# Altium PCB mppt.PcbDoc (part 2 of 6)
Units mm, origin at the board's own origin, x right, y up, seen from the top; angles counter-clockwise.
Board outline 161 x 166 mm, 6 copper layers (Top Layer, Layer 1, Layer 2, Layer 3, Layer 4, Bottom Layer), stack 0.815 mm thick; 460 components, 230 nets, 1421 pads, 2551 vias.
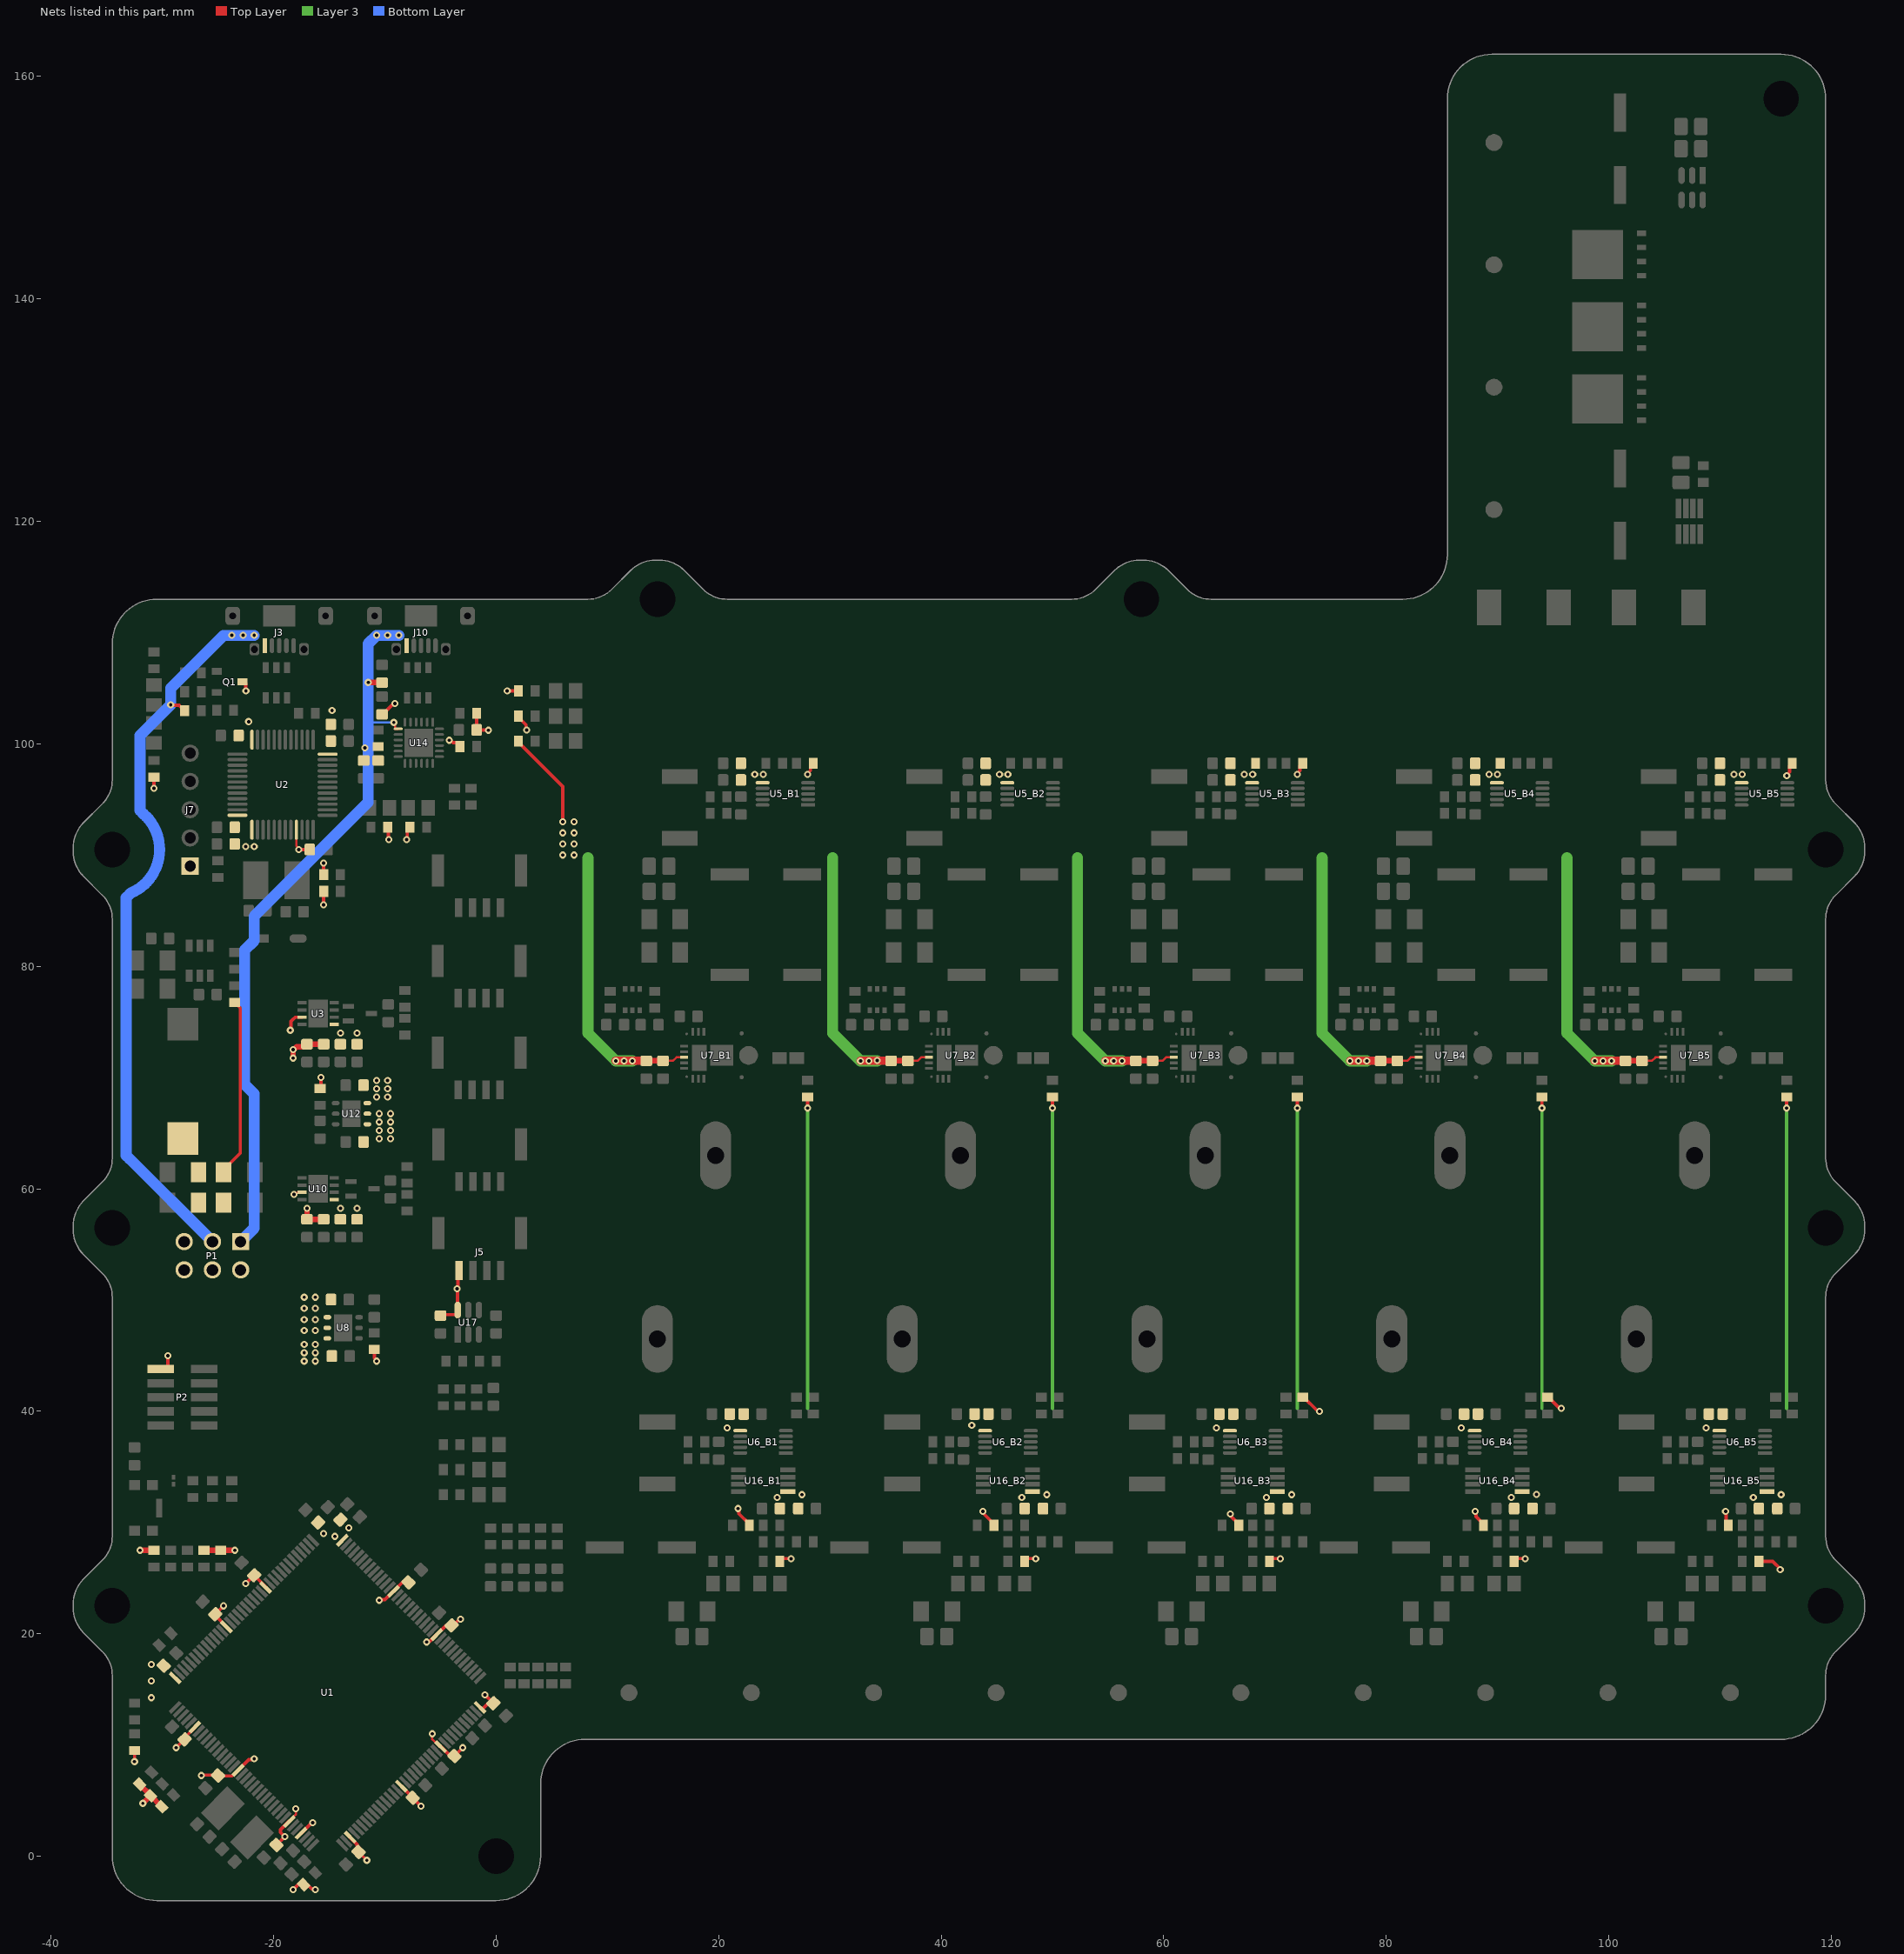
[diagram p6: the nets of this part, all layers, seen from the top]

## Footprints (in the part's own frame and the unit in brackets; to place one, negate y for a bottom-side part, rotate by r counter-clockwise, add the part's x,y. Pads: shape width x height; smd on the part's side, far side on the other; paste and mask are expansions set on the pad) (continued)
DFN6D_L [mm] "SON, 6-Leads, Body 3x3mm, Pitch 0.95mm, Thermal Pad 2.4x1.65mm, IPC High Density"
  oval 0.7x0.4 smd: 1(-1.425,0.95) 2(-1.425,0) 3(-1.425,-0.95) 4(1.425,-0.95) 5(1.425,0) 6(1.425,0.95)
  rect 1.65x2.4 smd: 7(0,0)
  silkscreen extent -1.7,-1.7 1.7,1.7, body extent -1.55,-1.55 1.55,1.55, height 0.95
FP-90120-0125-MFG [mm]
  rect 1.55x1.55 hole 1 paste-2539.97 mask+0: 1(-5.08,0)
  round 1.55 hole 1 paste-2539.97 mask+0: 2(-2.54,0) 3(0,0) 4(2.54,0) 5(5.08,0)
  silkscreen extent -7.07,-1.27 6.35,1.27, body extent -6.45,-1.37 6.45,1.37, height 0.25
FP-CC1206-1_25-IPC_B [mm]
  rect 1.403x1.806 smd paste+0 mask+0: 1(-1.4,0) 2(1.4,0)
  silkscreen extent -0.32,-0.8 0.32,0.8, body extent -2.35,-1.15 2.35,1.15, height 0.25
FP-CP2102N-A02-GQFN24R-IPC_C [mm]
  rect 0.81x0.239 smd paste+0 mask+0: 1(-1.851,1.25)
  rrect100% 0.81x0.239 smd paste+0 mask+0: 2(-1.851,0.75) 3(-1.851,0.25) 4(-1.851,-0.25) 5(-1.851,-0.75) 6(-1.851,-1.25) 13(1.851,-1.25) 14(1.851,-0.75) 15(1.851,-0.25) 16(1.851,0.25) 17(1.851,0.75) 18(1.851,1.25)
  rrect100% 0.239x0.81 smd paste+0 mask+0: 7(-1.25,-1.851) 8(-0.75,-1.851) 9(-0.25,-1.851) 10(0.25,-1.851) 11(0.75,-1.851) 12(1.25,-1.851) 19(1.25,1.851) 20(0.75,1.851) 21(0.25,1.851) 22(-0.25,1.851) 23(-0.75,1.851) 24(-1.25,1.851)
  rect 2.55x2.55 smd paste-1000 mask+0: 25(0,0)
  silkscreen extent -2.78,-2 2,2, body extent -2.36,-2.36 2.36,2.36, height 0.25
FP-DBV0006A-IPC_B [mm]
  rect 1.505x0.57 smd paste+0 mask+0: 1(-1.1,0.95)
  rrect100% 1.505x0.57 smd paste+0 mask+0: 2(-1.1,0) 3(-1.1,-0.95) 4(1.1,-0.95) 5(1.1,0) 6(1.1,0.95)
  silkscreen extent -2.4,-1.7 1.4,1.7, body extent -2.1,-1.7 2.1,1.7, height 0.25
FP-DGS0010A-IPC_C [mm]
  rect 1.257x0.312 smd paste+0 mask+0: 1(-2.051,1)
  rrect100% 1.257x0.312 smd paste+0 mask+0: 2(-2.051,0.5) 3(-2.051,0) 4(-2.051,-0.5) 5(-2.051,-1) 6(2.051,-1) 7(2.051,-0.5) 8(2.051,0) 9(2.051,0.5) 10(2.051,1)
  silkscreen extent -3.38,-1.5 0.92,1.5, body extent -2.78,-1.6 2.78,1.6, height 0.25
FP-NCU18-0_15-IPC_A [mm]
  rect 1.306x1.058 smd paste+0 mask+0: 1(-0.776,0) 2(0.776,0)
  silkscreen extent -1.43,-0.93 1.43,0.93, body extent -1.93,-1.03 1.93,1.03, height 0.25
FP-PG-TDSON-8-MFG [mm]
  rect 0.5x0.85 smd paste-1000 mask+0: 1(-1.905,-2.9) 2(-0.635,-2.9) 3(0.635,-2.9) 4(1.905,-2.9)
  rect 4.41x4.55 smd paste-1000 mask-1000: 5-6-7-8(0,1.05)
  silkscreen extent -2.67,-4.05 2.68,3.05, body extent -2.99,-3.43 3,3.42, height 0.25
FP-SOD123-IPC_A [mm]
  rect 1.557x0.742 smd paste+0 mask+0: 1(-1.7,0)
  rrect100% 1.557x0.742 smd paste+0 mask+0: 2(1.7,0)
  silkscreen extent -3.39,-0.77 1.33,0.78, body extent -2.98,-1.28 2.98,1.28, height 0.25
FP-ST0201-MFG [mm]
  rect 0.425x0.3 smd paste-1000 mask+0: 1(-0.312,0) 2(0.313,0)
  silkscreen extent -1.2,-0.52 0.33,0.52, body extent -0.63,-0.28 0.63,0.28, height 0.25
IEC_HotSurface_Small [mm]
  silkscreen extent -2.72,-2.36 2.72,2.35
IND_VER2923_COC [mil]
  oval 240x110 hole 60 slot 190 at 0 deg paste-99999 mask+0: 1(0,0) 2(650,-205.91)
  silkscreen extent -220,-442 870,236, body extent -215,-436 865,232, height 896
LQFP144-20x20mm [mil]
  rect 53x14 smd paste+0 mask+0: 1(-418.31,344.49) 2(-418.31,324.8) 3(-418.31,305.12) 4(-418.31,285.43) 5(-418.31,265.75) 6(-418.31,246.06) 7(-418.31,226.38) 8(-418.31,206.69) 9(-418.31,187.01) 10(-418.31,167.32) 11(-418.31,147.64) 12(-418.31,127.95) 13(-418.31,108.27) 14(-418.31,88.58) 15(-418.31,68.9) 16(-418.31,49.21) 17(-418.31,29.53) 18(-418.31,9.84) 19(-418.31,-9.84) 20(-418.31,-29.53) 21(-418.31,-49.21) 22(-418.31,-68.9) 23(-418.31,-88.58) 24(-418.31,-108.27) 25(-418.31,-127.95) 26(-418.31,-147.64) 27(-418.31,-167.32) 28(-418.31,-187.01) 29(-418.31,-206.69) 30(-418.31,-226.38) 31(-418.31,-246.06) 32(-418.31,-265.75) 33(-418.31,-285.43) 34(-418.31,-305.12) 35(-418.31,-324.8) 36(-418.31,-344.49) 73(418.31,-344.49) 74(418.31,-324.8) 75(418.31,-305.12) 76(418.31,-285.43) 77(418.31,-265.75) 78(418.31,-246.06) 79(418.31,-226.38) 80(418.31,-206.69) 81(418.31,-187.01) 82(418.31,-167.32) 83(418.31,-147.64) 84(418.31,-127.95) 85(418.31,-108.27) 86(418.31,-88.58) 87(418.31,-68.9) 88(418.31,-49.21) 89(418.31,-29.53) 90(418.31,-9.84) 91(418.31,9.84) 92(418.31,29.53) 93(418.31,49.21) 94(418.31,68.9) 95(418.31,88.58) 96(418.31,108.27) 97(418.31,127.95) 98(418.31,147.64) 99(418.31,167.32) 100(418.31,187.01) 101(418.31,206.69) 102(418.31,226.38) 103(418.31,246.06) 104(418.31,265.75) 105(418.31,285.43) 106(418.31,305.12) 107(418.31,324.8) 108(418.31,344.49)
  rect 14x53 smd paste+0 mask+0: 37(-344.49,-418.31) 38(-324.8,-418.31) 39(-305.12,-418.31) 40(-285.43,-418.31) 41(-265.75,-418.31) 42(-246.06,-418.31) 43(-226.38,-418.31) 44(-206.69,-418.31) 45(-187.01,-418.31) 46(-167.32,-418.31) 47(-147.64,-418.31) 48(-127.95,-418.31) 49(-108.27,-418.31) 50(-88.58,-418.31) 51(-68.9,-418.31) 52(-49.21,-418.31) 53(-29.53,-418.31) 54(-9.84,-418.31) 55(9.84,-418.31) 56(29.53,-418.31) 57(49.21,-418.31) 58(68.9,-418.31) 59(88.58,-418.31) 60(108.27,-418.31) 61(127.95,-418.31) 62(147.64,-418.31) 63(167.32,-418.31) 64(187.01,-418.31) 65(206.69,-418.31) 66(226.38,-418.31) 67(246.06,-418.31) 68(265.75,-418.31) 69(285.43,-418.31) 70(305.12,-418.31) 71(324.8,-418.31) 72(344.49,-418.31) 109(344.49,418.31) 110(324.8,418.31) 111(305.12,418.31) 112(285.43,418.31) 113(265.75,418.31) 114(246.06,418.31) 115(226.38,418.31) 116(206.69,418.31) 117(187.01,418.31) 118(167.32,418.31) 119(147.64,418.31) 120(127.95,418.31) 121(108.27,418.31) 122(88.58,418.31) 123(68.9,418.31) 124(49.21,418.31) 125(29.53,418.31) 126(9.84,418.31) 127(-9.84,418.31) 128(-29.53,418.31) 129(-49.21,418.31) 130(-68.9,418.31) 131(-88.58,418.31) 132(-108.27,418.31) 133(-127.95,418.31) 134(-147.64,418.31) 135(-167.32,418.31) 136(-187.01,418.31) 137(-206.69,418.31) 138(-226.38,418.31) 139(-246.06,418.31) 140(-265.75,418.31) 141(-285.43,418.31) 142(-305.12,418.31) 143(-324.8,418.31) 144(-344.49,418.31)
  silkscreen extent -468,-465 465,465, body extent -431,-431 431,431, height 63
MH_M3-Footprint-1 [mil]
  round 60 hole 125.98 unplated: 6(0,0)
ONSC-SOT-363-6-419B-02_W_V [mm] "SOT23, 6-Leads, Body 2x1.25mm, Pitch 0.65mm"
  rect 0.5x0.4 smd: 1(-0.95,0.65) 2(-0.95,0) 3(-0.95,-0.65) 4(0.95,-0.65) 5(0.95,0) 6(0.95,0.65)
  silkscreen extent -1.87,-1.1 0.3,1.1, body extent -1.05,-1 1.05,1, height 1.1
RES_3L000FEB_VIS [mil]
  rect 53x127 smd paste+0 mask+0: 1(-109.5,0) 2(109.5,0)
  silkscreen extent -71,-68 71,68, body extent -128,-64 128,64, height 15
RESC1608X55X25ML10T15 [mm] "Chip Resistor, 2-Leads, Body 1.60x0.80mm, IPC Low Density"
  rect 0.8x1 smd: 1(-0.75,0) 2(0.75,0)
  body extent -0.85,-0.45 0.85,0.45, height 0.55
RESC5032X135N [mm]
  rect 2.25x3.4 smd: 1(-1.85,0) 2(1.85,0)
  silkscreen extent 0,-1.5 0,1.5, body extent -2.59,-1.68 2.56,1.67, height 1.4
"SMD Push Button-Footprint-1" [mm]
  rect 0.9x1 smd: 1(-0.018,0.038) 2(-0.018,-1.562) 3(4.082,-1.562) 4(4.082,0.038)
  rect 1.7x0.55 smd: 5(2.032,0.663)
  silkscreen extent 0.83,-2.16 3.23,-2.16, body extent -0.27,-2.16 4.33,0.64, height 1.91
"SMD, P=1.27mm" [mm]
  rect 0.76x2.4 smd: 1(-0.127,0.076) 2(-0.127,3.976) 3(1.143,0.076) 4(1.143,3.976) 5(2.413,0.076) 6(2.413,3.976) 7(3.683,0.076) 8(3.683,3.976) 9(4.953,0.076) 10(4.953,3.976)
  silkscreen extent -3.81,-1.78 8.67,4.9, body extent -0.76,-2.41 5.59,4.95, height 6.99
SMTC-TSW-103-07-G-D_V [mm] "THD, 6-Leads, Body 7.62x5.08mm, Pitch 2.54mm"
  rect 1.55x1.55 hole 1.02: 1(-2.54,-1.27)
  round 1.55 hole 1.02: 2(-2.54,1.27) 3(0,-1.27) 4(0,1.27) 5(2.54,-1.27) 6(2.54,1.27)
  silkscreen extent -4.59,-2.54 3.81,2.54, body extent -3.81,-2.54 3.81,2.54, height 8.38
"Solder Pad-Footprint-1" [mil]
  round 60 smd paste-99999 mask+4: SP(155,165)
  Top Layer region: 0,0 315,0 315,315 0,315
  Bottom Layer region: 0,0 315,0 315,315 0,315
SON_4DRBRQ1_TEX [mil]
  rect 32x12 smd paste+0 mask+0: 1(-57,38.39) 2(-57,12.8) 3(-57,-12.79) 4(-57,-38.38) 5(57,-38.38) 6(57,-12.79) 7(57,12.8) 8(57,38.39)
  rect 69x98 smd paste+0 mask+0: 9(0,0)
  silkscreen extent -105,-66 66,66, body extent -61,-61 61,61, height 39
SOT23-6L_STM [mil]
  rect 38.5x22 smd paste+0 mask+0: 1(-53.75,37.4) 2(-53.75,0) 3(-53.75,-37.4) 4(53.75,-37.4) 5(53.75,0) 6(53.75,37.4)
  silkscreen extent -40,-65 39,65, body extent -59,-60 59,60, height 57
SOT323-3L_STM [mil]
  rect 18x40 smd paste+0 mask+0: 1(-25.59,-41) 2(25.59,-41) 3(0,41)
  silkscreen extent -98,-52 49,31, body extent -44,-47 44,47, height 43
STM-LQFP48_N [mm] "QFP, 48-Leads, Body 7x7mm, Pitch 0.5mm, IPC Medium Density"
  oval 1.8x0.3 smd: 1(-4.05,2.75) 2(-4.05,2.25) 3(-4.05,1.75) 4(-4.05,1.25) 5(-4.05,0.75) 6(-4.05,0.25) 7(-4.05,-0.25) 8(-4.05,-0.75) 9(-4.05,-1.25) 10(-4.05,-1.75) 11(-4.05,-2.25) 12(-4.05,-2.75) 25(4.05,-2.75) 26(4.05,-2.25) 27(4.05,-1.75) 28(4.05,-1.25) 29(4.05,-0.75) 30(4.05,-0.25) 31(4.05,0.25) 32(4.05,0.75) 33(4.05,1.25) 34(4.05,1.75) 35(4.05,2.25) 36(4.05,2.75)
  oval 0.3x1.8 smd: 13(-2.75,-4.05) 14(-2.25,-4.05) 15(-1.75,-4.05) 16(-1.25,-4.05) 17(-0.75,-4.05) 18(-0.25,-4.05) 19(0.25,-4.05) 20(0.75,-4.05) 21(1.25,-4.05) 22(1.75,-4.05) 23(2.25,-4.05) 24(2.75,-4.05) 37(2.75,4.05) 38(2.25,4.05) 39(1.75,4.05) 40(1.25,4.05) 41(0.75,4.05) 42(0.25,4.05) 43(-0.25,4.05) 44(-0.75,4.05) 45(-1.25,4.05) 46(-1.75,4.05) 47(-2.25,4.05) 48(-2.75,4.05)
  silkscreen extent -4.17,-2.75 2.75,3.5, body extent -4.5,-4.5 4.5,4.5, height 1.6
TO-236AB-3 [mm] "SOT23, 3-Leads, Body 2.90x2.30mm, Pitch 0.95mm, IPC Medium Density"
  rect 0.9x0.6 smd: 1(-1.15,0.95) 2(-1.15,-0.95) 3(1.15,0)
  silkscreen extent -1.27,-1.5 0.7,1.92, body extent -1.3,-1.5 1.3,1.5, height 1.1
USB [mm] "Micro USB port, Molex 47590-0001"
  rect 0.4x1.35 smd: 1(0,0)
  oval 0.4x1.35 smd: 2(-0.65,0) 3(-1.3,0) 4(-1.95,0) 5(-2.6,0)
  rrect50% 0.85x1.1 hole 0.65 slot 0.85 at 90 deg: 6(-3.525,0.325) 6(0.925,0.325)
  rrect50% 1.324x1.624 hole 0.6 slot 1.3 at 90 deg: 7(-5.475,-2.675) 7(2.875,-2.675)
  rect 2.9x1.9 smd: 7(-1.3,-2.675)
  silkscreen extent -5.72,-1.48 3.12,0.67, body extent -5.63,-5.35 3.03,0.55, height 2.73
VBN0018A-MFG [mm]
  round 0.228 smd paste+0 mask+0: 1(-1.925,3.125) 11(1.925,3.125)
  rect 0.7x0.25 smd paste+0 mask+0: 2(-2.1,2.575) 3(-2.1,2.075) 4(-2.1,1.575) 8(2.1,1.575) 9(2.1,2.075) 10(2.1,2.575)
  round 0.376 smd paste+0 mask+0: 5(-1.969,-1.819) 7(1.969,-1.819)
  round 1.691 smd paste-0.833 mask+0: 6(-0.01,-2.435)
  rect 0.25x0.7 smd paste+0 mask+0: 12(0.825,3.35) 13(0.325,3.35) 14(-0.175,3.35) 15(-0.675,3.35) 16(-1.175,3.35)
  rect 2.35x1.33 smd paste-1.162 mask+0: 17(-0.225,1.985)
  rect 1.9x2.076 smd paste-1.025 mask+0: 18(0,-0.018)
  Top Layer region: 1.8,2.95 2.4,2.95 2.45,3 2.45,3.15 2.4,3.2 2.05,3.2 2,3.25 2,3.65 1.95,3.7 1.8,3.7 1.75,3.65 1.75,3
  Top Layer region: 1.8,0.65 2.075,0.65 2.125,0.6 2.125,0.338 2.175,0.288 2.4,0.288 2.45,0.238 2.45,0.088 2.4,0.038 2.175,0.038 2.125,-0.012 2.125,-0.162 2.175,-0.212 2.4,-0.212 2.45,-0.262 2.45,-0.412 2.4,-0.462 2.175,-0.462 2.125,-0.512 2.125,-0.662 2.175,-0.712 2.4,-0.712 2.45,-0.762 2.45,-0.912 2.4,-0.962 2.175,-0.962 2.125,-1.012 2.125,-1.162 2.175,-1.212 2.4,-1.212 2.45,-1.262 2.45,-1.412 2.4,-1.462 2.175,-1.462 2.125,-1.512 2.125,-1.662 2.175,-1.712 2.4,-1.712 2.45,-1.762 2.45,-1.912 2.4,-1.962 2.175,-1.962 2.125,-2.012 2.125,-2.162 2.175,-2.212 2.4,-2.212 2.45,-2.262 2.45,-2.412 2.4,-2.462 2.175,-2.462 2.125,-2.512 2.125,-2.662 2.175,-2.712 2.4,-2.712 2.45,-2.762 2.45,-2.912 2.4,-2.962 2.175,-2.962 2.125,-3.012 2.125,-3.3 2.075,-3.35 1.8,-3.35 1.75,-3.3 1.75,0.6
  Top Layer region: -1.8,0.65 -2.075,0.65 -2.125,0.6 -2.125,0.338 -2.175,0.288 -2.4,0.288 -2.45,0.238 -2.45,0.088 -2.4,0.038 -2.175,0.038 -2.125,-0.012 -2.125,-0.162 -2.175,-0.212 -2.4,-0.212 -2.45,-0.262 -2.45,-0.412 -2.4,-0.462 -2.175,-0.462 -2.125,-0.512 -2.125,-0.662 -2.175,-0.712 -2.4,-0.712 -2.45,-0.762 -2.45,-0.912 -2.4,-0.962 -2.175,-0.962 -2.125,-1.012 -2.125,-1.162 -2.175,-1.212 -2.4,-1.212 -2.45,-1.262 -2.45,-1.412 -2.4,-1.462 -2.175,-1.462 -2.125,-1.512 -2.125,-1.662 -2.175,-1.712 -2.4,-1.712 -2.45,-1.762 -2.45,-1.912 -2.4,-1.962 -2.175,-1.962 -2.125,-2.012 -2.125,-2.162 -2.175,-2.212 -2.4,-2.212 -2.45,-2.262 -2.45,-2.412 -2.4,-2.462 -2.175,-2.462 -2.125,-2.512 -2.125,-2.662 -2.175,-2.712 -2.4,-2.712 -2.45,-2.762 -2.45,-2.912 -2.4,-2.962 -2.175,-2.962 -2.125,-3.012 -2.125,-3.3 -2.075,-3.35 -1.8,-3.35 -1.75,-3.3 -1.75,0.6
  Top Layer region: -1.8,2.95 -2.4,2.95 -2.45,3 -2.45,3.15 -2.4,3.2 -2.05,3.2 -2,3.25 -2,3.65 -1.95,3.7 -1.8,3.7 -1.75,3.65 -1.75,3
  Top Layer region: -1.45,1.37 -1.45,2.6 -1.35,2.7 0.9,2.7 1,2.6 1,-3.65 0.9,-3.75 -0.9,-3.75 -1,-3.65 -1,1.17 -1.1,1.27 -1.35,1.27
  Top Layer region: -0.55,-3.425 -0.55,-3.65 -0.6,-3.7 -0.75,-3.7 -0.8,-3.65 -0.8,-3.425 -0.85,-3.375 -0.9,-3.375 -0.95,-3.325 -0.95,-1.406 -0.9,-1.356 0.9,-1.356 0.95,-1.406 0.95,-3.325 0.9,-3.375 0.5,-3.375 0.45,-3.425 0.45,-3.65 0.4,-3.7 0.25,-3.7 0.2,-3.65 0.2,-3.425 0.15,-3.375 0,-3.375 -0.05,-3.425 -0.05,-3.65 -0.1,-3.7 -0.25,-3.7 -0.3,-3.65 -0.3,-3.425 -0.35,-3.375 -0.5,-3.375
  silkscreen extent -3.12,-3.88 2.63,3.88, body extent -2.24,-3.53 2.26,3.47, height 0.85
VSSOP8_DGK_TEX [mil]
  rect 52.5x17 smd paste+0 mask+0: 1(-87.25,38.39) 2(-87.25,12.8) 3(-87.25,-12.8) 4(-87.25,-38.39) 5(87.25,-38.39) 6(87.25,-12.8) 7(87.25,12.8) 8(87.25,38.39)
  silkscreen extent -132,-66 66,66, body extent -99,-61 99,61, height 43

## Part data
8 9 10 11 12 13: library part CMP-0074837-1, "IEC 61010-1 Hot Surface Warning", LatestRevisionDate=2017-07-06, Lib Reference=IEC_HotSurface, PartNumber="CAUTION HOT SURFACE", Published=2009-03-03, Publisher="Texas Instruments", SymbolCreator=a0412235, SymbolVersion=2011-08-22
C1 C2: library part CMP-00207-1, "6.3V 2.2uF X7R ±10% 0603 Multilayer Ceramic Capacitors MLCC - SMD/SMT ROHS", Case Code (Imperial)=0603, Case Code (Metric)=1608, Dielectric=X7R, Dielectric Material=Ceramic, Max Operating Temperature=125°C, Min Operating Temperature=-55°C, Tolerance=10%, Voltage Rating=6.3V, Case/Package=0603, China RoHS=Compliant, Composition=Ceramic, Country of Origin="Mainland China, Taiwan", Depth=800µm, Export Control Classification Number (ECCN) Code=EAR99, Halogen Free="Halogen Free", Harmonized Tariff Schedule (HTS) Code=8532.24.00.20, Height=800µm, Introduction Date=2009-04-17, Lead Free="Lead Free", Length=1.6mm, Lifecycle Status=Production, Material=Ceramic, Mounting Technology="Surface Mount", Number of Terminals=2, Packaging="Tape and Reel", Radiation Hardening=No, REACH SVHC=Yes, RoHS=Compliant, Schedule B="8532240020, 8532240020", Termination=SMD/SMT, Thickness=889µm, Voltage Rating (DC)=6.3V, Weight=2.012816mg, Width=800µm
C3: library part CMP-00209-1, "Multilayer Ceramic Capacitors MLCC - SMD/SMT 6.3V 4.7uF X7R 0603 20%", Case/Package=0603, Dielectric=X7R, Dielectric Material=Ceramic, Max Operating Temperature=125°C, Min Operating Temperature=-55°C, Tolerance=20%, Voltage Rating=6.3V, China RoHS=Compliant, Country of Origin="Mainland China, Taiwan", Export Control Classification Number (ECCN) Code=EAR99, Halogen Free="Halogen Free", Harmonized Tariff Schedule (HTS) Code=8532.24.00.20, Height=800µm, Introduction Date=2012-07-17, Lead Free="Lead Free", Length=1.6mm, Lifecycle Status=Production, Material=Ceramic, Mounting Technology="Surface Mount", Number of Terminals=2, REACH SVHC=Yes, RoHS=Compliant, Schedule B=8532240020, Voltage Rating (DC)=6.3V, Width=800µm
C4 C5 C17 C20 C22 C50_B1 C50_B2 C50_B3 C50_B4 C50_B5 C51_B1 C51_B2 C51_B3 C51_B4 C51_B5 C52_B1 C52_B2 C52_B3 C52_B4 C52_B5 C55 C57 C87_B1 C87_B2 C87_B3 C87_B4 C87_B5: library part CMP-00211-1, "16V 1uF X7R ±10% 0603 Multilayer Ceramic Capacitors MLCC - SMD/SMT ROHS", Case Code (Imperial)=0603, Case Code (Metric)=1608, Dielectric=X7R, Dielectric Material=Ceramic, Max Operating Temperature=125°C, Min Operating Temperature=-55°C, Tolerance=10%, Voltage=16V, Case/Package=0603, China RoHS=Compliant, Composition=Ceramic, Country of Origin="Mainland China, Taiwan", Depth=800µm, Dissipation Factor=5%, Export Control Classification Number (ECCN) Code=EAR99, Halogen Free="Halogen Free", Harmonized Tariff Schedule (HTS) Code=8532.24.00.20, Height=800µm, Introduction Date=2009-04-17, Lead Free="Lead Free", Length=1.6mm, Lifecycle Status=Production, Material=Ceramic, Mounting Technology="Surface Mount", Number of Terminals=2, Pins=2, Radiation Hardening=No, REACH SVHC=Yes, RoHS=Compliant, Schedule B="8532240020, 8532240020", Termination=SMD/SMT, Thickness=889µm, Voltage Rating=16V, Voltage Rating (DC)=16V, Width=800µm
C6 C7 C8 C9 C10 C11 C12 C13 C14 C15 C16 C18 C19 C21 C23_B1 C23_B2 C23_B3 C23_B4 C23_B5 C24_B1 C24_B2 C24_B3 C24_B4 C24_B5 C25_B1 C25_B2 C25_B3 C25_B4 C25_B5 C26_B1 C26_B2 C26_B3 C26_B4 C26_B5 C38 C41 C42 C43 C44 C45 C46 C49 C53 C54 C56 C58 C61 C76 C79 C81 C83 C84 C88_B1 C88_B2 C88_B3 C88_B4 C88_B5 C89 C90 C91 C92 C94: library part CMP-00179-1, "25V 100nF X7R ±10% 0603 Multilayer Ceramic Capacitors MLCC - SMD/SMT ROHS", Case Code (Imperial)=0603, Case Code (Metric)=1608, Dielectric=X7R, Dielectric Material=Ceramic, Max Operating Temperature=125°C, Min Operating Temperature=-55°C, Tolerance=10%, Voltage=25V, Case/Package=0603, China RoHS=Compliant, Composition=Ceramic, Depth=800µm, Halogen Free="Halogen Free", Height=800µm, Lead Free="Lead Free", Length=1.6mm, Lifecycle Status=Production, Material=Ceramic, Mounting Technology="Surface Mount", Number of Terminals=2, Pins=2, Radiation Hardening=No, REACH SVHC=Yes, RoHS=Compliant, Schedule B="8532240020, 8532240020", Termination=SMD/SMT, Thickness=889µm, Voltage Rating=25V, Voltage Rating (DC)=25V, Width=800µm
C27_B1 C27_B2 C27_B3 C27_B4 C27_B5 C28_B1 C28_B2 C28_B3 C28_B4 C28_B5: library part CMP-00294-1, "50V 220pF NP0 ±5% 0603 Multilayer Ceramic Capacitors MLCC - SMD/SMT ROHS", Case Code (Imperial)=0603, Dielectric=C0G, Dielectric Material=Ceramic, Insulation Resistance=100GΩ, Max Operating Temperature=125°C, Min Operating Temperature=-55°C, Temperature Coefficient=30ppm/°C, Tolerance=5%, Voltage=50V, Case/Package=0603, China RoHS=Compliant, Composition=Ceramic, Country of Origin="Mainland China, Taiwan", Depth=800µm, Export Control Classification Number (ECCN) Code=EAR99, Halogen Free="Halogen Free", Harmonized Tariff Schedule (HTS) Code=8532.24.00.20, Height=800µm, Introduction Date=2005-07-07, Lead Free="Lead Free", Length=1.6mm, Lifecycle Status=Production, Mounting Technology="Surface Mount", Number of Terminals=2, Pins=2, Radiation Hardening=No, REACH SVHC=Yes, RoHS=Compliant, Schedule B="8532240020, 8532240020", Termination=SMD/SMT, Thickness=889µm, Voltage Rating=50V, Voltage Rating (AC)=50V, Voltage Rating (DC)=50V, Width=800µm
C29_B1 C29_B2 C29_B3 C29_B4 C29_B5 C30_B1 C30_B2 C30_B3 C30_B4 C30_B5 C36_B1 C36_B2 C36_B3 C36_B4 C36_B5 C69 C70: library part CMP-00184-1, "1206 2.2 uF 100 V ±10% Tolerance X7R SMT Multilayer Ceramic Chip Capacitor", Case/Package=1206, Dielectric Material=Ceramic, Max Operating Temperature=125°C, Min Operating Temperature=-55°C, Tolerance=10%, Voltage Rating=100V, China RoHS=Compliant, Height=1.6mm, Length=3.2mm, Lifecycle Status=Production, Material=Ceramic, Mounting Technology="Surface Mount", Number of Terminals=2, REACH SVHC=Yes, RoHS=Compliant, Schedule B="8532240020, 8532240020", Thickness=1.4478mm, Voltage Rating (DC)=100V, Width=1.6mm
C31_B1 C31_B2 C31_B3 C31_B4 C31_B5 C32_B1 C32_B2 C32_B3 C32_B4 C32_B5 C35_B1 C35_B2 C35_B3 C35_B4 C35_B5 C64 C65: library part CMP-00270-3, "Radial Can - SMD ALUMINUM ELECTROLYTIC CAPACITOR FK 100V 22muF ±20% 0.315Dia 8.00mm", Case/Package=Radial, ESR (Equivalent Series Resistance)=1.3Ω, Leakage Current=22µA, Manufacturer Lifecycle Status=ACTIVE, Manufacturer_Name=Panasonic, Manufacturer_Part_Number=EEE-FK2A220P, Max Operating Temperature=105°C, Min Operating Temperature=-55°C, Ratings=AEC-Q200, Ripple Current=130mA, Tolerance=20%, Voltage=100V, Copyright="Copyright (C) 2025 Ultra Librarian. All rights reserved.", Country of Origin="Japan, Malaysia", Design Item ID=EEE-FK2A220P, Diameter=8mm, Dissipation Factor=7%, Export Control Classification Number (ECCN) Code=EAR99, Harmonized Tariff Schedule (HTS) Code=8532.22.00.20, Height=10.2mm, Height - Seated (Max)=10.4902mm, Impedance=1.3Ω, Introduction Date=2004-08-25, Lead Diameter=900µm, Lead Free="Lead Free", Lead Pitch=3.1mm, Length=10.2mm, Life (Hours)=2000hours, Lifecycle Status=Production, Material=Aluminium, Mounting Technology="Surface Mount", Number of Terminals=2, Packaging="Cut Tape", Part Series=FK, Pins=2, Polarity=Polar, Radiation Hardening=No, REACH SVHC=Yes, Ripple Current (AC)=130mA, RoHS=Compliant, Schedule B="8532220020, 8532220020", Source=EEE-FK2A220P.SchLib, Termination=SMD/SMT, Voltage Rating=100V, Voltage Rating (DC)=100V, Width=8.3mm
C33_B1 C33_B2 C33_B3 C33_B4 C33_B5 C34_B1 C34_B2 C34_B3 C34_B4 C34_B5 C37_B1 C37_B2 C37_B3 C37_B4 C37_B5 C66 C67 C85: library part CMP-00180-1, "Multilayer Ceramic Capacitors MLCC - SMD/SMT 100V 0.22uF X7R 0805 10%", Capacitance=33uF, Capacitor Type=Ceramic, Case Code (Imperial)=0805, Case Code (Metric)=2012, Dielectric=X7R, Manufacturer Part Number=C2012X5R1A336M125AC, Max Operating Temperature=125°C, Min Operating Temperature=-55°C, Negative Tolerance=20%, Package Shape=Rectangular, Package Style=SMTMeter, Rated DC Voltage (URdc)=10V, Temperature Characteristics Code=X5R, Tolerance=10%, Voltage Rating=100V, Case/Package=0805, China RoHS=Compliant, Composition=Ceramic, Dielectric Material=Ceramic, Height=1.25mm, JESD-609 Code=e3, Length=2mm, Lifecycle Status=Production, Mount="Surface Mount", Mounting Technology="Surface Mount", Multilayer=Yes, Number of Terminals=2, Number of Terminals/Pins=2, Packaging="Tape & Reel (TR)", Positive Tolerance=20%, REACH SVHC=Yes, RoHS=Compliant, RoHS Compliant=Yes, Schedule B="8532240020, 8532240020", Size Code=0805, Terminal Finish=Nickel, Termination=SMD/SMT, Thickness=711.2µm, Voltage Rating (DC)=100V, Weight=5.499807mg, Width=1.25mm
C39 C40 C77 C78: library part CMP-00295-1, "0603 33 pF 50 V ±5 % Tolerance C0G/NP0 SMT Multilayer Ceramic Capacitor", Case/Package=0603, Dielectric=C0G, Dielectric Material=Ceramic, Max Operating Temperature=125°C, Min Operating Temperature=-55°C, Tolerance=5%, Voltage Rating (DC)=50V, China RoHS=Compliant, Composition=Ceramic, Country of Origin="Mainland China, Taiwan", Depth=800µm, Export Control Classification Number (ECCN) Code=EAR99, Halogen Free="Halogen Free", Harmonized Tariff Schedule (HTS) Code=8532.24.00.20, Height=800µm, Introduction Date=2003-08-13, Lead Free="Lead Free", Length=1.6mm, Lifecycle Status=Production, Mounting Technology="Surface Mount", Number of Terminals=2, Packaging="Tape and Reel", Radiation Hardening=No, REACH SVHC=Yes, RoHS=Compliant, Width=800µm
C47 C48 C59 C60 C80 C82: library part CMP-00273-1, "16V 4.7uF X5R ±10% 0603 Multilayer Ceramic Capacitors MLCC - SMD/SMT ROHS", Case Code (Imperial)=0603, Case Code (Metric)=1608, Dielectric=X5R, Dielectric Material=Ceramic, Max Operating Temperature=85°C, Min Operating Temperature=-55°C, Tolerance=10%, Voltage Rating=16V, Case/Package=0603, China RoHS=Compliant, Composition=Ceramic, Country of Origin="Mainland China, Taiwan", Depth=800µm, Export Control Classification Number (ECCN) Code=EAR99, Halogen Free="Halogen Free", Harmonized Tariff Schedule (HTS) Code=8532.24.00.20, Height=800µm, Introduction Date=2013-02-05, Lead Free="Lead Free", Length=1.6mm, Lifecycle Status=Production, Material=Ceramic, Mounting Technology="Surface Mount", Number of Terminals=2, REACH SVHC=Yes, RoHS=Compliant, Schedule B="8532240020, 8532240020", Termination=SMD/SMT, Thickness=939.8µm, Voltage Rating (DC)=16V, Weight=2.012816mg, Width=800µm
C62_B1 C62_B2 C62_B3 C62_B4 C62_B5 C63_B1 C63_B2 C63_B3 C63_B4 C63_B5 C68 C71: library part CMP-00275-1, "Ceramic Capacitor, Ceramic, 100V, 5% +Tol, 5% -Tol, X7R, 0.15 TC, 0.1uF, Surface Mount, 0603", Case/Package=0603, Dielectric Material=Ceramic, Max Operating Temperature=125°C, Min Operating Temperature=-55°C, Voltage Rating (DC)=100V, China RoHS=Compliant, Height=800µm, Length=1.6mm, Lifecycle Status=Production, Mounting Technology="Surface Mount", Number of Terminals=2, REACH SVHC=Yes, RoHS=Compliant, Width=800µm
C72 C73 C74 C75: library part CMP-00279-1, "10V 22uF X7R ±10% 1206 Multilayer Ceramic Capacitors MLCC - SMD/SMT ROHS", Case Code (Imperial)=1206, Case Code (Metric)=3216, Dielectric=X7R, Dielectric Material=Ceramic, Max Operating Temperature=125°C, Min Operating Temperature=-55°C, Tolerance=10%, Voltage Rating=10V, Case/Package=1206, China RoHS=Compliant, Composition=Ceramic, Country of Origin="Mainland China, Taiwan", Export Control Classification Number (ECCN) Code=EAR99, Halogen Free="Halogen Free", Harmonized Tariff Schedule (HTS) Code=8532.24.00.20, Height=1.6mm, Introduction Date=2014-07-08, Lead Free="Lead Free", Length=3.2mm, Lifecycle Status=Production, Mounting Technology="Surface Mount", Number of Terminals=2, Packaging="Tape & Reel (TR)", REACH SVHC=Yes, RoHS=Compliant, Schedule B="8532240020, 8532240020", Termination=SMD/SMT, Thickness=1.8034mm, Voltage Rating (DC)=10V, Weight=16.187578mg, Width=1.6mm
C93: library part CMP-00293-1, "Surface Mount Ceramic Multilayer Capacitor 0.001uF 10% X7R 50V 0603 Paper T/R", Case Code (Imperial)=0603, Case Code (Metric)=1608, Dielectric=X7R, Dielectric Material=Ceramic, Insulation Resistance=100GΩ, Max Operating Temperature=125°C, Min Operating Temperature=-55°C, Tolerance=10%, Voltage=50V, Case/Package=0603, China RoHS=Compliant, Composition=Ceramic, Depth=800µm, Halogen Free="Halogen Free", Height=800µm, Lead Free="Lead Free", Length=1.6mm, Lifecycle Status=Production, Material=Ceramic, Mounting Technology="Surface Mount", Number of Terminals=2, Pins=2, Radiation Hardening=No, REACH SVHC=Yes, RoHS=Compliant, Schedule B="8532240020, 8532240020", Termination=SMD/SMT, Thickness=889µm, Voltage Rating=50V, Voltage Rating (DC)=50V, Width=800µm
CR1 CR2: library part CMP-304-000000-1, "ESD Protection for USB 2.0 High Speed", Manufacturer_Name=STMicroelectronics, Copyright="Copyright (C) 2025 Ultra Librarian. All rights reserved.", Design Item ID=USBLC6-2SC6, Manufacturer_Part_Number=USBLC6-2SC6, RefDes=RefDes, Source=USBLC6-2SC6.SchLib, Type=Type
D1_B1 D1_B2 D1_B3 D1_B4 D1_B5 D2 D7 D9 D10 D11 D12 D14: library part CMP-002-000017-2, "Emerald 0805  Light Emitting Diodes (LED) ROHS GREEN JLCPCB PICK&PLACE", Color=Emerald, JLCPCB Part #=C2297, Manufacturer="Hubei KENTO Elec", MFR.Part #=C2297
D3 D4_B1 D4_B2 D4_B3 D4_B4 D4_B5 D6 D13: library part CMP-002-000018-2, "Red 0805  Light Emitting Diodes (LED) ROHS JLCPCB PICK&PLACE", Color=Red, JLCPCB Part #=C84256, Manufacturer="Foshan NationStar Optoelectronics", MFR.Part #=C84256
D5_B1 D5_B2 D5_B3 D5_B4 D5_B5: library part CMP-002-000050-1, "MBD54DWT1G Series 30 V 600 mA Dual Schottky Barrier Diode - SOT-363", Average Rectified Current=200mA, Case/Package=SOT-363-6, Forward Voltage=1V, Manufacturer Lifecycle Status=ACTIVE, Max Forward Surge Current (Ifsm)=600mA, Max Operating Temperature=125°C, Max Power Dissipation=150mW, Max Repetitive Reverse Voltage (Vrrm)=30V, Max Reverse Leakage Current=2µA, Min Operating Temperature=-55°C, Reverse Standoff Voltage=25V, China RoHS=Compliant, Contact Plating=Tin, Country of Origin="Mainland China", Current Rating=200mA, Element Configuration=Dual, Export Control Classification Number (ECCN) Code=EAR99, Forward Current=200mA, Halogen Free="Halogen Free", Harmonized Tariff Schedule (HTS) Code=8541.10.00.70, Height=1mm, Introduction Date=2000-08-27, Lead Free="Lead Free", Length=2.2mm, Lifecycle Status=Production, Max Output current=200mA, Max Reverse Voltage (DC)=30V, Max Surge Current=600mA, Min Breakdown Voltage=30V, Number of Elements=2, Number of Terminals=6, Packaging="Tape and Reel", Peak Non-Repetitive Surge Current=600mA, Peak Reverse Current=2µA, Pins=6, Power Dissipation=150mW, Radiation Hardening=No, REACH SVHC=Yes, Recovery Time=5ns, Reverse Recovery Time=5ns, RoHS=Compliant, Schedule B="8541100070, 8541100070", Termination=SMD/SMT, Voltage Rating (DC)=30V, Width=1.35mm
D8: library part CMP-002-000051-1, "20W 6.1V 6.1V 3V 0201 ESD and Surge Protection (TVS/ESD) ROHS", Breakdown Voltage=7.05V, Case Code (Imperial)=0201, Case/Package=SMD/SMT, Clamping Voltage=21V, Leakage Current=100nA, Max Breakdown Voltage=8V, Max Junction Temperature (Tj)=125°C, Max Power Dissipation=20W, Max Repetitive Reverse Voltage (Vrrm)=3V, Min Breakdown Voltage=6.1V, Min Operating Temperature=-40°C, Peak Pulse Current=2A, Power Line Protection=No, Test Current=1mA, China RoHS=Compliant, Composition=Zener, Country of Origin="Mainland China", Depth=300µm, Direction=Unidirectional, Element Configuration=Single, ESD Protection=Yes, Export Control Classification Number (ECCN) Code=EAR99, Harmonized Tariff Schedule (HTS) Code=8541.10.00.50, Height=330µm, Introduction Date=2008-10-13, Lead Free="Lead Free", Length=600µm, Lifecycle Status=Obsolete, Max Operating Temperature=125°C, Max Reverse Leakage Current=100nA, Mounting Technology="Surface Mount", Number of Channels=1, Number of Elements=1, Number of Terminals=2, Number of Unidirectional Channels=1, Peak Pulse Power=20W, Peak Reverse Current=100nA, Pins=2, Polarity=Unidirectional, Power Dissipation=20W, Radiation Hardening=No, REACH SVHC=Yes, Reverse Breakdown Voltage=6.1V, Reverse Standoff Voltage=3V, RoHS=Compliant, Schedule B="8536300000, 8536300000", Termination=SMD/SMT, Width=350µm
D15 D17: library part CMP-371-000000-3, "Description", Manufacturer_Name="Littelfuse Inc", Copyright="Copyright (C) 2025 Ultra Librarian. All rights reserved.", Design Item ID=5.0SMDJ58A, Manufacturer_Part_Number=5.0SMDJ58A, Source=5P0SMDJ58A.SchLib
D16: library part CMP-002-000047-1, "Rectifier Diode Schottky 1A Automotive 2-Pin SOD-123F / DIODE SCHOTTKY 60V 1A SOD123F", Forward Current=1A, Forward Voltage=250mV, Max Forward Surge Current (Ifsm)=9A, Max Operating Temperature=150°C, Max Power Dissipation=375mW, Max Repetitive Reverse Voltage (Vrrm)=60V, Min Operating Temperature=-65°C, Peak Reverse Current=50µA, China RoHS=Compliant, Contact Plating=Tin, Country of Origin="Mainland China", Element Configuration=Single, Export Control Classification Number (ECCN) Code=EAR99, Harmonized Tariff Schedule (HTS) Code=8541.10.00.80, Introduction Date=2006-04-18, Lifecycle Status=Production, Max Output current=1A, Number of Elements=1, Number of Terminals=2, Packaging="Cut Tape", Pins=2, REACH SVHC=Yes, Reverse Standoff Voltage=60V, RoHS=Compliant, Termination=SMD/SMT
H1 H2 H3 H4 H5 H7 H8 H9 H10 H11: library part CMP-00278-2, "Non-plated M3 Mounting hole."
J1 J4 J5 J8 J9: library part CMP-189-000000-2, "Description", Manufacturer_Name=JST, Copyright="Copyright (C) 2026 Ultra Librarian. All rights reserved.", Design Item ID=BM04B-GHS-TBT, Manufacturer_Part_Number=BM04B-GHS-TBT, RefDes=RefDes, Source=BM04B-GHS-TBT.SchLib, Type=Type
J3 J10: library part CMP-014-000015-2, "USB Connector Micro-AB SMD, 5 Contact(s), Female, Right Angle, Surface Mount Terminal, Locking, Receptacle, JLCPCB, PICK&PLACE", JLCPCB Part #=C136001, Manufacturer=MOLEX, MFR.Part #=475900001, Source=https://jlcpcb.com/partdetail/Molex-475900001/C136001
J7: library part CMP-014-000025-1, "Board Connector, 5 Contact(s), 1 Row(s), Male, Straight, 0.1 inch Pitch, Solder Terminal, Black Insulator, Receptacle", Contact Resistance=20mR, Dielectric Withstanding Voltage (DC)=350V, Flammability Rating="UL94 V-0", Insulation Color=Black, Insulation Resistance=5GR, Max Operating Temperature=125°C, Min Operating Temperature=-55°C, Rated Current (Signal)=3A, Body Breadth=0.1inch, Body Depth=0.098inch, Body Length=0.5inch, Body/Shell Style=RECEPTACLE, Connector Type="BOARD CONNECTOR", Contact Finish - Mating="NOT SPECIFIED", Contact Finish - Termination="Gold (Au)", Contact Gender=Male, Contact Material="Copper Alloy", Contact Pattern=RECTANGULAR, Contact Style="SQ PIN-SKT", DIN Conformance=No, Filter Feature=No, IEC Conformance=No, Insertion Force-Max=3.0024N, Insulation Material=Glass, JESD-609 Code=e4, Mating Contact Pitch=0.1inch, Mating Information="MULTIPLE MATING PARTS AVAILABLE", MIL Conformance=No, Mixed Contacts=No, Mounting Style=STRAIGHT, Mounting Technology=Board, Number Of Connectors=1, Number of Contacts=5, Number Of PCB Rows=1, Number of Rows Loaded=1, Option="General Purpose", PCB Contact Pattern=RECTANGULAR, Plating Thickness=160uin, Reach SVHC Compliant=Yes, Reference Standard=UL, Reliability=COMMERCIAL, RoHS Compliant=Yes, Terminal Length=0.114inch, Terminal Pitch=2.54mm, Termination=Solder, Withdrawl Force-Min=0.1946N
L1_B1 L1_B2 L1_B3 L1_B4 L1_B5: library part CMP-050-000031-4, "Description", Manufacturer_Name=Coilcraft, Copyright="Copyright (C) 2026 Ultra Librarian. All rights reserved.", Design Item ID=VER2923-333KL, Manufacturer_Part_Number=VER2923-333KL, Source=VER2923-333KL.SchLib
L2: library part CMP-050-000032-1, "General Purpose Inductor, 15uH, 20%, 1 Element, Ferrite-Core, SMD, 5137", DC Resistance (DCR)=46mΩ, Inductance Tolerance=20%, Max Current Rating=3.1A, Max Operating Temperature=85°C, Min Operating Temperature=-40°C, Saturation Current=3A, Self Resonant Frequency=27MHz, Test Frequency=100kHz, Core Material=Ferrite, Country of Origin="Mainland China", Export Control Classification Number (ECCN) Code=EAR99, Harmonized Tariff Schedule (HTS) Code=8504.50.80.00, Height=5.21mm, Introduction Date=2005-05-06, Lead Free="Contains Lead", Length=12.95mm, Lifecycle Status=Production, Max DC Current=3.1A, Number of Circuits=1, Number of Terminals=2, Packaging="Cut Tape", REACH SVHC=Yes, RMS Current (Irms)=3.1A, RoHS=Compliant, Shielding=Unshielded, Termination=SMD/SMT, Tolerance=20%, Width=9.4mm
P1: library part CMP-014-000047-1, "CONN HEADER VERT 6POS 2.54MM / Connector Header Through Hole 6 position 0.100\" (2.54mm)", Color=Black, Manufacturer Lifecycle Status=PRODUCTION, Max Current Rating=7.6A, Max Operating Temperature=125°C, Max Voltage Rating (AC)=550V, Min Operating Temperature=-55°C, Connector Type="Male Pin", Contact Material=Bronze, Contact Mating Length=5.842mm, Contact Plating=Gold, Depth=5.08mm, Gender=Male, Housing Color=Black, Housing Material=Polyester, Lead Free="Lead Free", Lead Pitch=2.54mm, Lifecycle Status=Production, Mounting Technology="Through Hole", Number of Contacts=6, Number of Positions=6, Number of Rows=2, Orientation=Straight, Packaging=Bulk, Pins=6, Pitch=2.54mm, Radiation Hardening=No, REACH SVHC=No, RoHS=Compliant, Row Spacing=2.54mm, Termination=Solder, Width=5.08mm
P2: library part CMP-CON-00005-10, "ARM Coresight 10 Header", JLCPCB Part #=C5250218, Manufacturer Part Number=3220-10-0300-00, ComponentLink1Description=Digikey, ComponentLink1URL=https://www.digikey.com.au/en/products/detail/cnc-tech/3220-10-0300-00/3883266?s=N4IgTCBcDaIIxwOwFYC0cBsYCcqByAIiALoC%2BQA
Q1: library part CMP-001-0003-7, "NPN general-purpose transistors in a small SOT23 (TO-236AB) Surface-Mounted Device (SMD)", JLCPCB Part #=C5336792, ComponentLink1Description=Mouser, ComponentLink1URL=https://au.mouser.com/ProductDetail/Nexperia/BC847C-QR?qs=e8oIoAS2J1RqA3Lgar2wrA%3D%3D, Manufacturer Part Number=BC847C-QR
Q2 Q3 Q4: library part CMP-060-000024-2, "On a Reel of 5000, N-Channel MOSFET, 100 A, 100 V, 8-Pin TDSON Infineon BSC040N10NS5ATMA1", Continuous Drain Current (ID)=18A, Drain to Source Breakdown Voltage=100V, Drain to Source Resistance=4mΩ, Gate to Source Voltage (Vgs)=20V, Input Capacitance=4.1nF, Max Junction Temperature (Tj)=150°C, Max Power Dissipation=2.5W, Min Operating Temperature=-55°C, Package Quantity=5000, Power Dissipation=139W, China RoHS=Non-Compliant, Contact Plating=Tin, Country of Origin="Austria, Germany, Mainland China, Malaysia", Drain to Source Voltage (Vdss)=100V, Element Configuration=Single, Export Control Classification Number (ECCN) Code=EAR99, Fall Time=10ns, Halogen Free="Halogen Free", Height=1.1mm, Introduction Date=2015-01-07, Lead Free="Contains Lead", Lifecycle Status=Production, Max Dual Supply Voltage=100V, Max Operating Temperature=150°C, Min Breakdown Voltage=100V, Mounting Technology="Surface Mount", Number of Channels=1, Number of Elements=1, Number of Terminals=5, On-State Resistance=4mΩ, Packaging="Tape & Reel", Pins=8, Rds On Max=4mΩ, REACH SVHC=No, Rise Time=9ns, RoHS=Compliant, Schedule B="8541290080, 8541290080", Turn-Off Delay Time=32ns, Turn-On Delay Time=13ns, Weight=506.605978mg
R1 R10 R11_B1 R11_B2 R11_B3 R11_B4 R11_B5 R12_B1 R12_B2 R12_B3 R12_B4 R12_B5 R13_B1 R13_B2 R13_B3 R13_B4 R13_B5 R14 R15 R17 R18 R19 R20 R58 R59 R60 R78 R79 R82 R86_B1 R86_B2 R86_B3 R86_B4 R86_B5: library part CMP-RES-00050-1, "GENERAL PURPOSE CHIP RESISTOR Metal Glaze/thick Film, 0.1W, 0ohm, Surface Mount, 0603", Case Code (Imperial)=0603, Max Operating Temperature=155°C, Min Operating Temperature=-55°C, Power Dissipation=100mW, Temperature Coefficient=200ppm/°C, Tolerance=1%, Voltage Rating=50V, Case/Package=0603, China RoHS=Non-Compliant, Composition="Thick Film", Contact Plating=Tin, Country of Origin="Mainland China, Taiwan", Depth=800µm, Export Control Classification Number (ECCN) Code=EAR99, Harmonized Tariff Schedule (HTS) Code=8533.21.00.30, Height=450µm, Introduction Date=2001-06-08, Lead Free="Lead Free", Length=1.6mm, Lifecycle Status=Production, Military Standard=Not, Mounting Technology="Surface Mount", Number of Terminals=2, Packaging="Cut Tape", Pins=2, Power Rating=100mW, Radiation Hardening=No, REACH SVHC=Yes, RoHS=Compliant, Termination=SMD/SMT, Voltage Rating (DC)=50V, Width=800µm
R2 R3 R50 R51: library part CMP-RES-00051-1, "Res Thick Film 0603 60.4 Ohm 1% 0.1W(1/10W) ±100ppm/C Pad SMD T/R", Case Code (Imperial)=0603, Max Operating Temperature=155°C, Min Operating Temperature=-55°C, Power Dissipation=100mW, Temperature Coefficient=100ppm/°C, Tolerance=1%, Voltage Rating=75V, Voltage Rating (DC)=50V, Case/Package=0603, China RoHS=Non-Compliant, Composition="Thick Film", Country of Origin="Mainland China, Taiwan", Depth=800µm, Export Control Classification Number (ECCN) Code=EAR99, Harmonized Tariff Schedule (HTS) Code=8533.21.00.30, Height=450µm, Introduction Date=2004-09-22, Lead Free="Lead Free", Length=1.6mm, Lifecycle Status=Production, Military Standard=Not, Mounting Technology="Surface Mount", Number of Terminals=2, Packaging="Tape & Reel", Power Rating=100mW, REACH SVHC=Yes, RoHS=Compliant, Schedule B="8533210045, 8533210045", Termination=SMD/SMT, Width=800µm, Working Voltage=75V
R4_B1 R4_B2 R4_B3 R4_B4 R4_B5 R5_B1 R5_B2 R5_B3 R5_B4 R5_B5: library part CMP-RES-00090-4, "WSLF2512 .003 1% EB e3", Manufacturer_Name=Vishay, Copyright="Copyright (C) 2026 Ultra Librarian. All rights reserved.", Datasheet=https://www.vishay.com/doc?30193, Design Item ID=WSLF25123L000FEB, Manufacturer_Part_Number=WSLF25123L000FEB, Source=WSLF25123L000FEB.SchLib
R6_B1 R6_B2 R6_B3 R6_B4 R6_B5 R7_B1 R7_B2 R7_B3 R7_B4 R7_B5 R36 R40 R53_B1 R53_B2 R53_B3 R53_B4 R53_B5 R54_B1 R54_B2 R54_B3 R54_B4 R54_B5 R55_B1 R55_B2 R55_B3 R55_B4 R55_B5 R56_B1 R56_B2 R56_B3 R56_B4 R56_B5: library part CMP-RES-00083-1, "Yageo RC0603FR-07100RL 0603 SMD Resistor 100 Ohm thin film chip resistor", Case Code (Imperial)=0603, Max Operating Temperature=155°C, Min Operating Temperature=-55°C, Power Dissipation=100mW, Temperature Coefficient=100ppm/°C, Tolerance=1%, Voltage Rating=75V, Voltage Rating (DC)=50V, Case Code (Metric)=0603, Case/Package=0603, China RoHS=Non-Compliant, Composition="Thick Film", Contact Plating=Tin, Depth=800µm, Height=450µm, Lead Free="Lead Free", Length=1.6mm, Lifecycle Status=Production, Military Standard=Not, Mounting Technology="Surface Mount", Number of Terminals=2, Packaging="Cut Tape (CT)", Pins=2, Power Rating=100mW, Radiation Hardening=No, REACH SVHC=Yes, RoHS=Compliant, Schedule B="8533210045, 8533210045", Termination=SMD/SMT, Width=800µm, Working Voltage=75V
R8 R31 R32 R37 R38: library part CMP-RES-00026-1, "Res General Purpose Thick Film 0603 100k Ohm 1% 1/10W ±100ppm/°C Molded Paper T/R", Case Code (Imperial)=0603, Max Operating Temperature=155°C, Min Operating Temperature=-55°C, Power Dissipation=100mW, Temperature Coefficient=100ppm/°C, Tolerance=1%, Voltage Rating=75V, Voltage Rating (DC)=50V, Case Code (Metric)=0603, Case/Package=0603, China RoHS=Non-Compliant, Composition="Thick Film", Depth=800µm, Height=450µm, Lead Free="Lead Free", Length=1.6mm, Lifecycle Status=Production, Military Standard=Not, Mounting Technology="Surface Mount", Number of Terminals=2, Number of Terminations=2, Packaging="Tape & Reel", Pins=2, Power Rating=100mW, REACH SVHC=Yes, RoHS=Compliant, Schedule B="8533210045, 8533210045", Termination=SMD/SMT, Width=800µm, Working Voltage=75V
R9_B1 R9_B2 R9_B3 R9_B4 R9_B5 R35 R39 R41 R47 R52 R65 R66 R67 R71 R83_B1 R83_B2 R83_B3 R83_B4 R83_B5 R84_B1 R84_B2 R84_B3 R84_B4 R84_B5 R85_B1 R85_B2 R85_B3 R85_B4 R85_B5: library part CMP-RES-00040-1, "10 kOhms ±1% 0.1W, 1/10W Chip Resistor 0603 (1608 Metric) Moisture Resistant Thick Film", Case/Package=0603, Tolerance=1%
R16_B1 R16_B2 R16_B3 R16_B4 R16_B5 R48 R49 R80 R81 R95 R96: library part CMP-RES-00087-1, "Yageo RC0603FR-074K7L Resistor 0603 SMD 4.7k Ohm 1% 100mW Thick Film", Case Code (Imperial)=0603, Max Operating Temperature=155°C, Min Operating Temperature=-55°C, Power Rating=100mW, Temperature Coefficient=100ppm/°C, Tolerance=1%, Voltage Rating=75V, Voltage Rating (DC)=50V, Case/Package=0603, China RoHS=Non-Compliant, Composition="Thick Film", Contact Plating=Tin, Country of Origin="Mainland China, Taiwan", Depth=800µm, Export Control Classification Number (ECCN) Code=EAR99, Harmonized Tariff Schedule (HTS) Code=8533.21.00.30, Height=450µm, Introduction Date=2004-09-22, Lead Free="Lead Free", Lead Pitch=300µm, Length=1.6mm, Lifecycle Status=Production, Military Standard=Not, Mounting Technology="Surface Mount", Number of Terminals=2, Packaging="Tape & Reel", Pins=2, Radiation Hardening=No, REACH SVHC=Yes, RoHS=Compliant, Schedule B="8533210045, 8533210045", Termination=SMD/SMT, Width=800µm, Working Voltage=75V
R21 R22 R23 R24 R25 R43 R44 R45_B1 R45_B2 R45_B3 R45_B4 R45_B5 R46_B1 R46_B2 R46_B3 R46_B4 R46_B5 R62 R63 R64 R68 R69 R70 R75 R76 R77 R92: library part CMP-RES-00029-1, "1 kOhms ±1% 0.1W, 1/10W Chip Resistor 0603 (1608 Metric) Moisture Resistant Thick Film", Case/Package=0603, Tolerance=1%
R30: library part CMP-RES-00091-1, "100mW Thick Film Resistors 75V ±100ppm/℃ ±1% 19.1kΩ 0603 Chip Resistor - Surface Mount ROHS", Case Code (Imperial)=0603, Max Operating Temperature=155°C, Min Operating Temperature=-55°C, Power Rating=100mW, Temperature Coefficient=100ppm/°C, Tolerance=1%, Voltage Rating=75V, Voltage Rating (DC)=50V, Case/Package=0603, China RoHS=Non-Compliant, Composition="Thick Film", Contact Plating=Tin, Depth=800µm, Height=450µm, Lead Free="Lead Free", Length=1.6mm, Lifecycle Status=Production, Military Standard=Not, Mounting Technology="Surface Mount", Number of Terminals=2, Number of Terminations=2, Packaging="Tape & Reel", REACH SVHC=Yes, RoHS=Compliant, Schedule B="8533210045, 8533210045", Termination=SMD/SMT, Width=800µm, Working Voltage=75V
R34_B1 R34_B2 R34_B3 R34_B4 R34_B5: library part CMP-00271-1, "NTC Thermistors; MURATA; NCU18XH103F6SRB; 10 kOhm; 1 %; 0603; 950 µm", Case Code (Imperial)=0603, Case Code (Metric)=1608, Max Current Rating=100µA, Max Operating Temperature=150°C, Min Operating Temperature=-55°C, Ratings=AEC-Q200, Tolerance=1%, Voltage Rating=5V, Case/Package=0603, Export Control Classification Number (ECCN) Code=EAR99, Harmonized Tariff Schedule (HTS) Code=8533.40.80.70, Height=800µm, Introduction Date=2016-05-16, Length=1.6mm, Lifecycle Status=Production, Mounting Technology="Surface Mount", Number of Terminals=2, REACH SVHC=Yes, RoHS=Compliant, Schedule B="8533400080, 8533400080", Width=800µm, Working Voltage=5V
R42: library part CMP-RES-00084-1, "Res General Purpose Thick Film 0603 1.5k Ohm 5% 1/10W ±100ppm/°C Molded Paper T/R", Case Code (Imperial)=0603, Max Operating Temperature=155°C, Max Power Dissipation=100mW, Min Operating Temperature=-55°C, Temperature Coefficient=100ppm/°C, Tolerance=5%, Voltage Rating=75V, Voltage Rating (AC)=50V, Case/Package=0603, China RoHS=Non-Compliant, Composition="Thick Film", Contact Plating=Tin, Depth=800µm, Features="Moisture Resistant", Height=450µm, Lead Free="Lead Free", Length=1.6mm, Lifecycle Status=Production, Military Standard=Not, Mounting Technology="Surface Mount", Number of Terminals=2, Number of Terminations=2, Packaging="Tape & Reel", Pins=2, Power Dissipation=100mW, Power Rating=100mW, Radiation Hardening=No, REACH SVHC=Yes, RoHS=Compliant, Schedule B="8533210045, 8533210045", Termination=SMD/SMT, Voltage Rating (DC)=50V, Weight=2.012816mg, Width=800µm, Working Voltage=75V
R61: library part CMP-RES-00092-1, "100Mw Thick Film Resistors 100Ppm/ 1% 2.2K 0603 Chip Resistor Surface Mount Rohs", Case Code (Imperial)=0603, Max Operating Temperature=155°C, Max Power Dissipation=100mW, Min Operating Temperature=-55°C, Temperature Coefficient=100ppm/°C, Tolerance=1%, Voltage Rating=75V, Voltage Rating (DC)=50V, Case Code (Metric)=0603, Case/Package=0603, China RoHS=Non-Compliant, Composition="Thick Film", Contact Plating=Tin, Country of Origin="Mainland China, Taiwan", Depth=800µm, Export Control Classification Number (ECCN) Code=EAR99, Features="Moisture Resistant", Harmonized Tariff Schedule (HTS) Code=8533.21.00.30, Height=450µm, Introduction Date=2004-09-22, Lead Free="Lead Free", Length=1.6mm, Lifecycle Status=Production, Military Standard=Not, Mounting Technology="Surface Mount", Number of Terminals=2, Number of Terminations=2, Packaging="Tape & Reel", Pins=2, Power Rating=100mW, Radiation Hardening=No, REACH SVHC=Yes, RoHS=Compliant, Schedule B="8533210045, 8533210045", Termination=SMD/SMT, Width=800µm, Working Voltage=75V
R93: library part CMP-RES-00100-1, "0603 5.23K ohms 1% thick film surface mount chip resistor", Case Code (Imperial)=0603, Case Code (Metric)=1608, Max Operating Temperature=155°C, Min Operating Temperature=-55°C, Power Rating=100mW, Temperature Coefficient=100ppm/°C, Tolerance=1%, Voltage Rating=50V, Working Voltage=75V, Case/Package=0603, China RoHS=Non-Compliant, Composition="Thick Film", Contact Plating=Tin, Country of Origin="Mainland China, Taiwan", Export Control Classification Number (ECCN) Code=EAR99, Harmonized Tariff Schedule (HTS) Code=8533.21.00.30, Height=450µm, Introduction Date=2004-09-22, Length=1.6mm, Lifecycle Status=Production, Mounting Technology="Surface Mount", Number of Terminals=2, Packaging="Tape & Reel", Radiation Hardening=No, REACH SVHC=Yes, RoHS=Compliant, Termination=SMD/SMT, Width=800µm
R94: library part CMP-RES-00099-1, "100mW Thick Film Resistors 75V ±100ppm/℃ ±1% 2.05kΩ 0603 Chip Resistor - Surface Mount ROHS", Case Code (Imperial)=0603, Max Operating Temperature=155°C, Max Power Dissipation=100mW, Min Operating Temperature=-55°C, Temperature Coefficient=100ppm/°C, Tolerance=1%, Voltage Rating=75V, Voltage Rating (DC)=50V, Case/Package=0603, China RoHS=Non-Compliant, Composition="Thick Film", Country of Origin="Mainland China, Taiwan", Depth=800µm, Export Control Classification Number (ECCN) Code=EAR99, Features="Moisture Resistant", Harmonized Tariff Schedule (HTS) Code=8533.21.00.30, Height=450µm, Introduction Date=2004-09-22, Lead Free="Lead Free", Length=1.6mm, Lifecycle Status=Production, Military Standard=Not, Mounting Technology="Surface Mount", Number of Terminals=2, Number of Terminations=2, Power Rating=100mW, REACH SVHC=Yes, RoHS=Compliant, Schedule B="8533210045, 8533210045", Termination=SMD/SMT, Width=800µm, Working Voltage=75V
S1: library part CMP-011-00000-2, "Tactile Switches SPST Rnd Bttn Gull .05A 32VDC 1W SMD", JLCPCB Part #=C72443, Manufacturer Part Number=KMR221GLFS, ComponentLink1Description=Mouser, ComponentLink1URL=https://au.mouser.com/ProductDetail/CK/KMR221GLFS?qs=sb%252But3Lm4x2RtkMQYdEYMA%3D%3D
SP1_B1 SP1_B2 SP1_B3 SP1_B4 SP1_B5 SP2_B1 SP2_B2 SP2_B3 SP2_B4 SP2_B5 SP3 SP4 SP5 SP6: library part CMP-014-000043-5, "64mm^2 solder pad for wire to board connections,"
U1: library part CMP-015-000045-1, "High-performance and DSP with DP-FPU, Arm Cortex-M7 MCU with 2MBytes of Flash memory, 1MB RAM, 480 MHz CPU, Art Accelerator, L1 cache, external memory interface, large set of peripherals", Manufacturer_Name=STMicroelectronics, Copyright="Copyright (C) 2025 Ultra Librarian. All rights reserved.", Design Item ID=STM32H743ZIT6, Manufacturer_Part_Number=STM32H743ZIT6, RefDes=RefDes, Source=STM32H743ZIT6.SchLib, Type=Type
U2: library part CMP-015-000003-2, "RISC Microcontroller, 32-Bit, FLASH, CORTEX-M3 CPU, 72MHz, CMOS, PQFP48", JLCPCB Part #=C8304
U3 U10: library part CMP-157-000000-1, "Automotive high-speed CAN transceiver 8-SON -40 to 125", Manufacturer_Name="Texas Instruments", Copyright="Copyright (C) 2025 Ultra Librarian. All rights reserved.", Datasheet=https://www.ti.com/lit/gpn/tcan1044-q1, Design Item ID=TCAN1044DRBRQ1, Manufacturer_Part_Number=TCAN1044DRBRQ1, RefDes=RefDes, Source=TCAN1044DRBRQ1.SchLib, Type=Type
U4 U11: library part CMP-002-000046-1, "Automotive dual-line TVS in SOT323-3L for CAN bus (24 V system)", Manufacturer_Name=STMicroelectronics, Copyright="Copyright (C) 2025 Ultra Librarian. All rights reserved.", Design Item ID=ESDCAN05-2BWY, Manufacturer_Part_Number=ESDCAN05-2BWY, RefDes=RefDes, Source=ESDCAN05-2BWY.SchLib, Type=Type